# Altium PCB PCB_mathis.PcbDoc
Units mm, origin at the board's own origin, x right, y up, seen from the top; angles counter-clockwise.
Board outline 67.5 x 52.5 mm, 2 copper layers (Top Layer, Bottom Layer); 18 components, 10 nets, 37 pads, 0 vias.
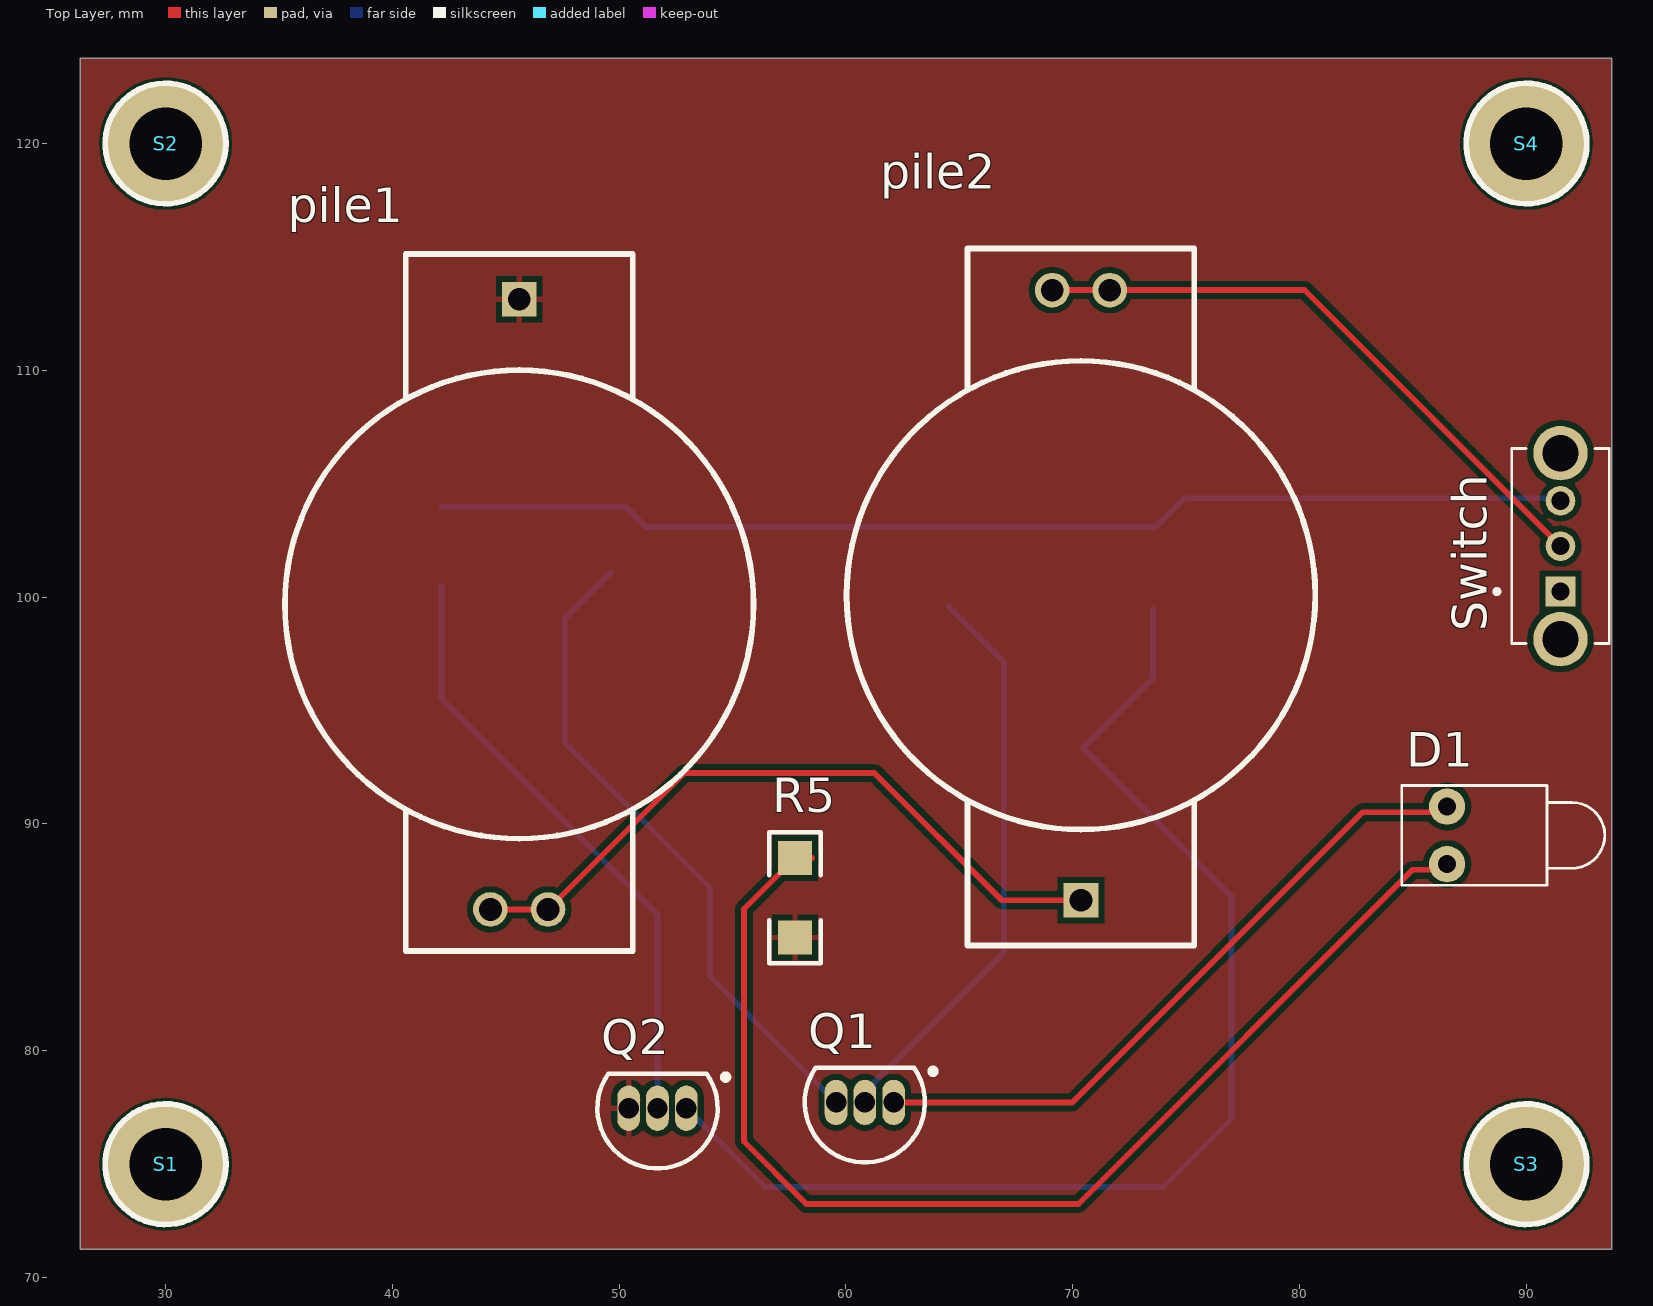
[diagram p0: Top Layer view]
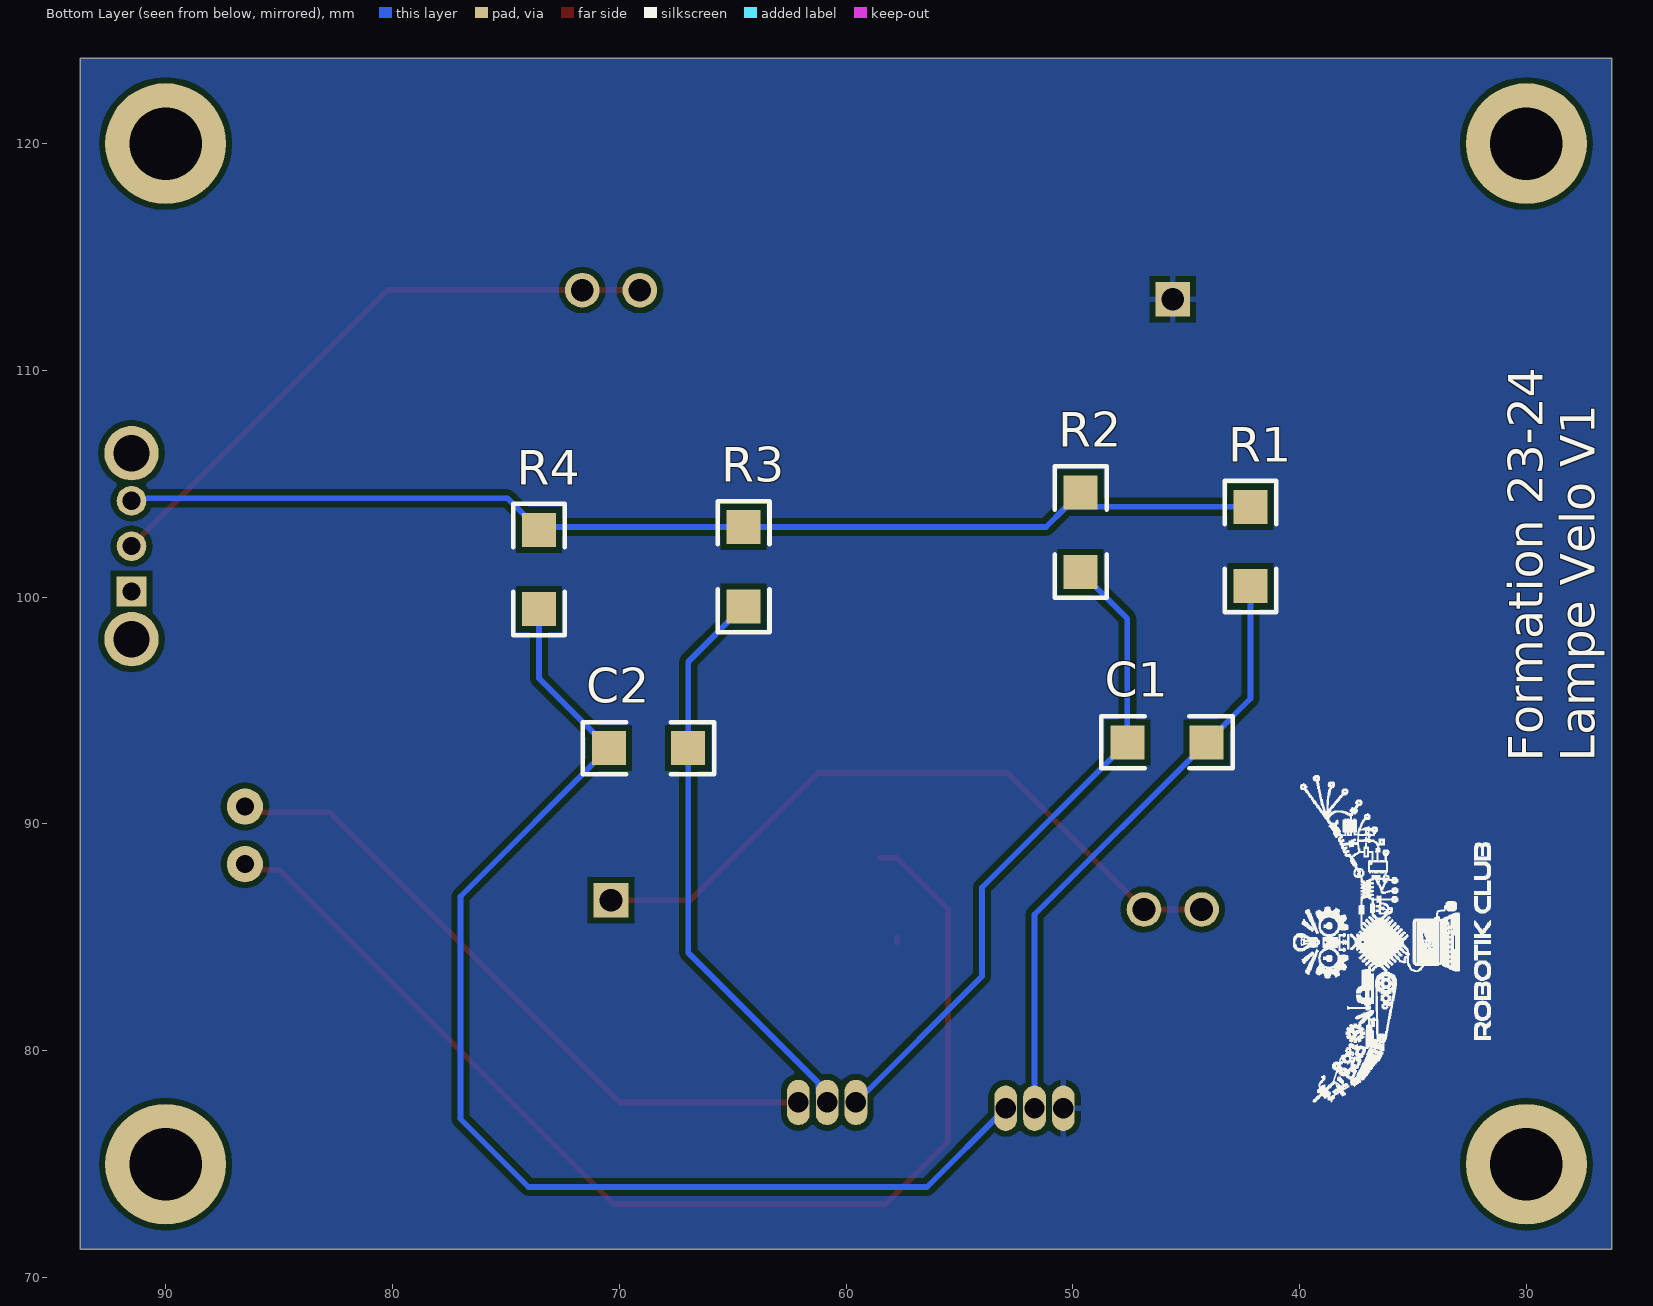
[diagram p1: Bottom Layer view, seen from below]
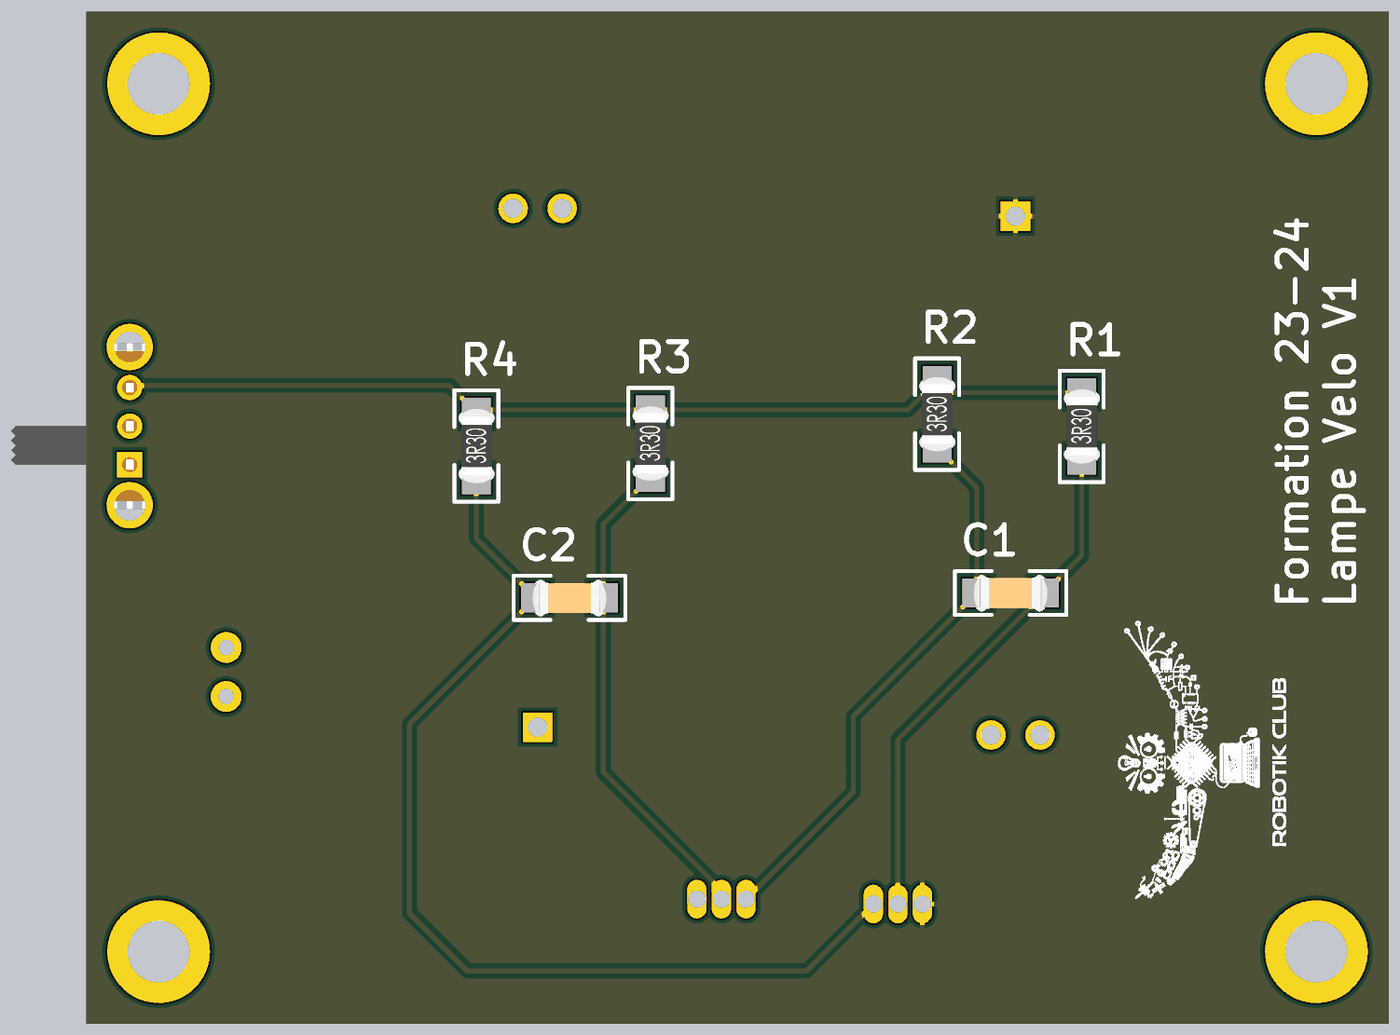
[diagram p2: 3D render of the assembled board from below, using the file's embedded part models]

## Layer stack, top to bottom
Top Solder: solder mask 0.0102, Solder Resist, Dk 3.5
Top Layer: signal copper 0.0356
Dielectric 1: dielectric 0.32, FR-4, Dk 4.8
Bottom Layer: signal copper 0.0356
Bottom Solder: solder mask 0.0102, Solder Resist, Dk 3.5

## Board outline
26.25,123.75 26.25,71.25 93.75,71.25 93.75,123.75 26.25,123.75

## Design rules (kind name [scope] priority, off if disabled: settings)
Clearance [All] p1: gap=0.254
PolygonConnect [All] p1: connectstyle=Relief reliefconductorwidth=0.254 reliefentries=4 polygonreliefangle="90 Angle" airgapwidth=0.254
RoutingVias [All] p1: holewidth=0.711 width=1.27 viastyle="Through Hole" minholewidth=0.711 minwidth=1.27 maxholewidth=0.711 maxwidth=1.27
SolderMaskExpansion [All] p1: expansion=0.102
Width [All] p1: maxlimit=0.254 minlimit=0.254 preferedwidth=0.254
30 further rules are at their usual default settings.

## Classes and differential pairs
component class pcb_mathis: C1 C2 pile1 pile2 Q1 Q2 R1 R2 R3 R4 R5 S1 S2 S3 S4 Switch

## Components (designator, comment, footprint, x,y, rotation, side; value= is the part's Value field where it differs from the comment)
C1 "Cap Pol1" "Capacitor 1206" 45.847,93.599 r180 bottom
C2 "Cap Pol1" "Capacitor 1206" 68.707,93.345 r180 bottom
D1 "LED1" LED-1 86.5,89.5 r0 top
pile1 "" PCBComponent_1 46.863,86.233 r90 top
pile2 "" PCBComponent_1 69.088,113.538 r270 top
Q1 "2N3904" TO-226-AA 60.833,77.724 r90 top
Q2 "2N3904" TO-226-AA 51.689,77.47 r90 top
R1 "Res2" "Resistor 1206" 42.164,102.235 r90 bottom
R2 "1k" "Resistor 1206" 49.657,102.87 r90 bottom
R3 "" "Resistor 1206" 64.516,101.346 r90 bottom
R4 "Res2" "Resistor 1206" 73.533,101.219 r90 bottom
R5 "330" "Resistor 1206" 57.75,86.75 r90 top
S1 "Screw M3" "Screw M3" 30,75 r0 top
S2 "Screw M3" "Screw M3" 30,120 r0 top
S3 "Screw M3" "Screw M3" 90,75 r0 top
S4 "Screw M3" "Screw M3" 90,120 r0 top
Switch "EG1247" SW_EG1247 91.5,102.25 r90 top
? "" Logo_lowres 36.5,84.75 r90 top

## Footprints (in the part's own frame and the unit in brackets; to place one, negate y for a bottom-side part, rotate by r counter-clockwise, add the part's x,y. Pads: shape width x height; smd on the part's side, far side on the other; paste and mask are expansions set on the pad)
"Capacitor 1206" [mm]
  rect 1.5x1.5 smd: 1(-1.75,0) 2(1.75,0)
  silkscreen extent -2.89,-1.14 2.89,1.14, body extent -1.98,-0.99 1.98,0.96, height 1.3
LED-1 [mm] "LED; 2 Leads"
  round 1.6 hole 0.8: 1(0,1.27) 2(0,-1.27)
  silkscreen extent -2,-2.2 6.95,2.2
Logo_lowres [mm]
PCBComponent_1 [mm]
  round 1.528 hole 1: "1 +"(0,0) "2 + "(0,2.54)
  rect 1.528x1.528 hole 1: "3 -"(26.9,1.27)
  silkscreen extent -1.83,-9.06 28.9,11.6
"Resistor 1206" [mm]
  rect 1.5x1.5 smd: 1(-1.75,0) 2(1.75,0)
  silkscreen extent -2.89,-1.14 2.89,1.14, body extent -1.98,-0.95 1.98,0.93, height 0.55
"Screw M3" [mm] "M3 iso Screw"
  round 5.32 hole 3.2 unplated: 0(0,0)
  silkscreen extent -2.66,-2.66 2.66,2.66
SW_EG1247 [mm]
  rect 1.308x1.308 / inner round 1.308 / far side rect 1.308x1.308 hole 0.8: 1(-2,0)
  round 1.308 hole 0.8: 2(0,0) 3(2,0)
  round 2.4 hole 1.6: SH1(-4.1,0) SH2(4.1,0)
  silkscreen extent -4.3,-2.15 4.3,2.9, body extent -4.3,-6.15 4.3,2.15, height 4.7
TO-226-AA [mm] "TO, Flat Index; 3 In-Line, Axial Leads; Body Dia. 4.8mm; Leads 0.55 x 0.51 mm (max)"
  oval 2x1 hole 0.9: 1(0,-1.27) 2(0,0) 3(0,1.27)
  silkscreen extent -2.65,-3.13 1.52,2.65, body extent -2.65,-2.66 1.52,2.66, height 5.33

## Part data
C1 C2: "Polarized Capacitor (Radial)"
D1: "Typical RED GaAs LED"
pile1 pile2: library part Component_1
Q1 Q2: library part NPN, "NPN Bipolar Transistor"
R1 R4: "Resistor"
R2 R3 R5: library part Res2, "Resistor"
Switch: "Slide Switch SPDT Through Hole, Right Angle"

## Nets (pads, with @x,y where several pads share a name; then routed paths per layer and width w, separated by ;. In a path a pad name is that pad's centre, name@x,y a point inside that pad or via, vN(x,y) a via of type N, cw(c..) or ccw(c..) an arc to the next point about the centre after c; other vN are vias at no path point)
DIODE: D1.1 Q1.1 | length 29.8
  Top Layer w0.254: Q1.1 69.974,77.724 82.77,90.52 86.25,90.52 D1.1
GND: "pile1.3 -" Q2.3 R5.1 | length 0.7
  Top Layer w0.254: Q2.3 Q2.3@50.808,77.859 ; R5.1@57.75,84.801 R5.1
NetC1_1: C1.1 Q1.3 R2.1 | length 29.2
  Bottom Layer w0.254: R2.1 47.597,99.06 C1.1 54,87.196 54,83.287 Q1.3
NetC1_2: C1.2 Q2.2 R1.1 | length 27
  Bottom Layer w0.254: R1.1 42.164,95.532 C1.2 51.689,86.007 Q2.2
NetC2_1: C2.1 Q2.1 R4.1 | length 53.2
  Bottom Layer w0.254: Q2.1 56.429,74 74,74 77,77 77,86.802 C2.1 73.533,96.421 R4.1
NetC2_2: C2.2 Q1.2 R3.1 | length 25.4
  Bottom Layer w0.254: Q1.2 61.222,78.113 61.222,78.589 66.957,84.324 C2.2 66.957,97.155 R3.1
NetD1_2: D1.2 R5.2 | length 52.2
  Top Layer w0.254: R5.2@58.5,88.5 R5.2 55.5,86.25 55.5,76 58.25,73.25 70.25,73.25 84.98,87.98 D1.2@86.25,87.98
NETPILE: "pile1.1 +" "pile1.2 + " "pile2.3 -" | length 30.9
  Top Layer w0.254: 44.323,86.233 46.863,86.233 52.88,92.25 61.25,92.25 66.862,86.638 70.358,86.638
NetR1_2: R1.2 R2.2 R3.2 R4.2 Switch.3 | length 50.1
  Bottom Layer w0.254: R1.2 50.292,103.985 51.181,103.096 R3.2 73.66,103.096 74.926,104.362 Switch.3@91.388,104.362
VCC: "pile2.1 +" "pile2.2 + " Switch.2 | length 27.1
  Top Layer w0.254: 69.088,113.538 71.628,113.538 80.212,113.538 Switch.2
pads on no net: S1.0 S2.0 S3.0 S4.0 Switch.1 Switch.SH1 Switch.SH2

## Polygon pours and split planes (outlines as drawn)
GND on Top Layer "Top Layer-No Net" (solid, remove dead copper, pour order 1): 26.25,123.75 26.25,71.25 93.75,71.25 93.75,123.75 26.25,123.75
GND on Bottom Layer "Top Layer-No Net1" (solid, remove dead copper, pour order 2): 26.25,123.75 26.25,71.25 93.75,71.25 93.75,123.75 26.25,123.75

## Silkscreen, mask and mechanical layers (free items; w line width, h text height)
Bottom Overlay:
  text "Formation 23-24 / Lampe Velo V1" at 27,92.75 h1.52 r270
Mechanical 1:
  the board outline again, w0.254